# EAGLE board SPWF04SA-v1.0.0 (EAGLE 7.7.0)
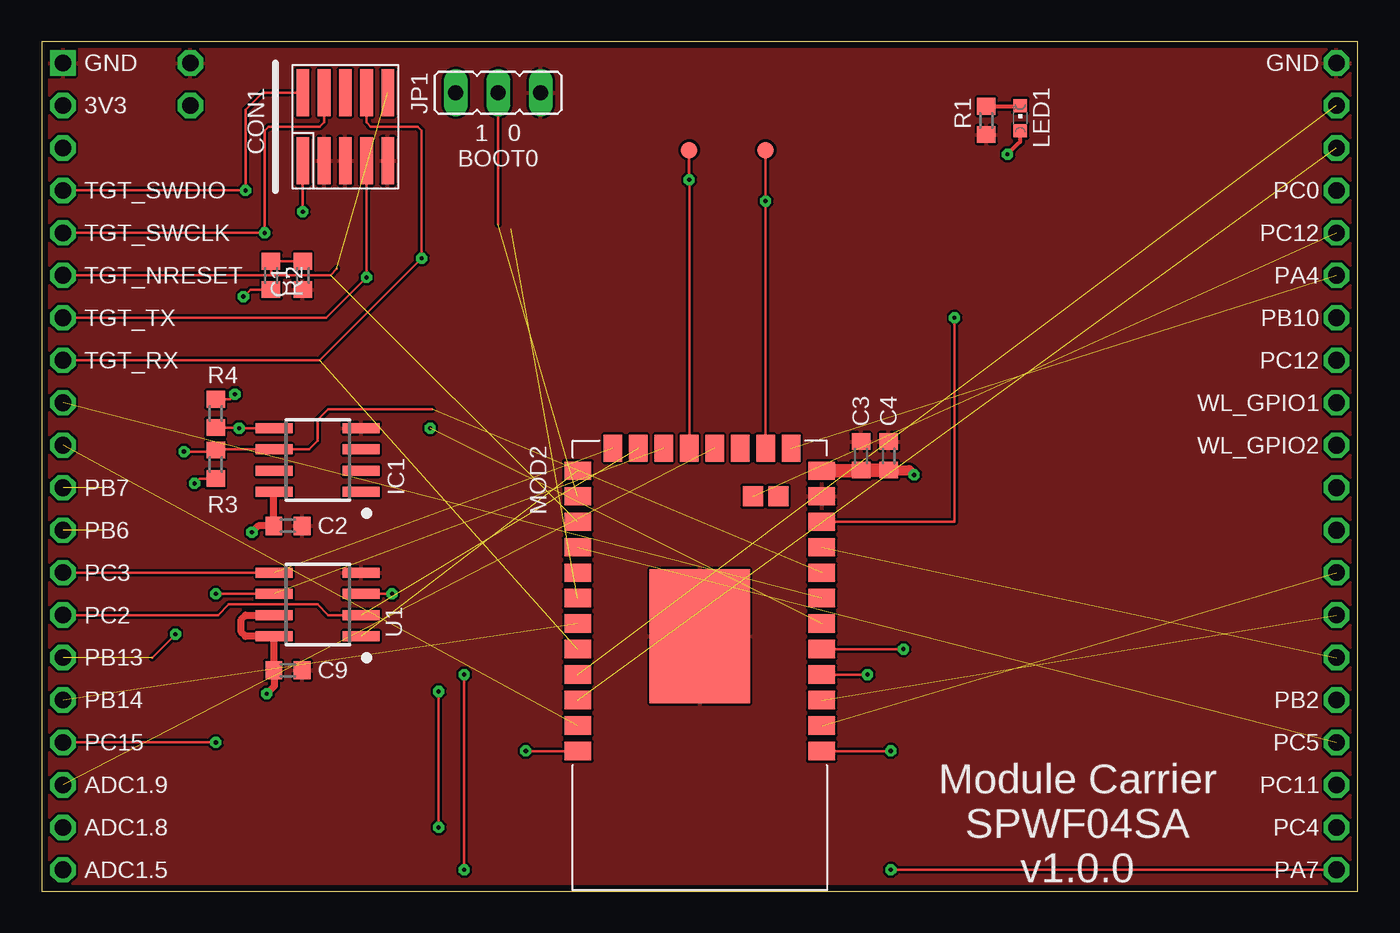
[diagram p0: board, top side]
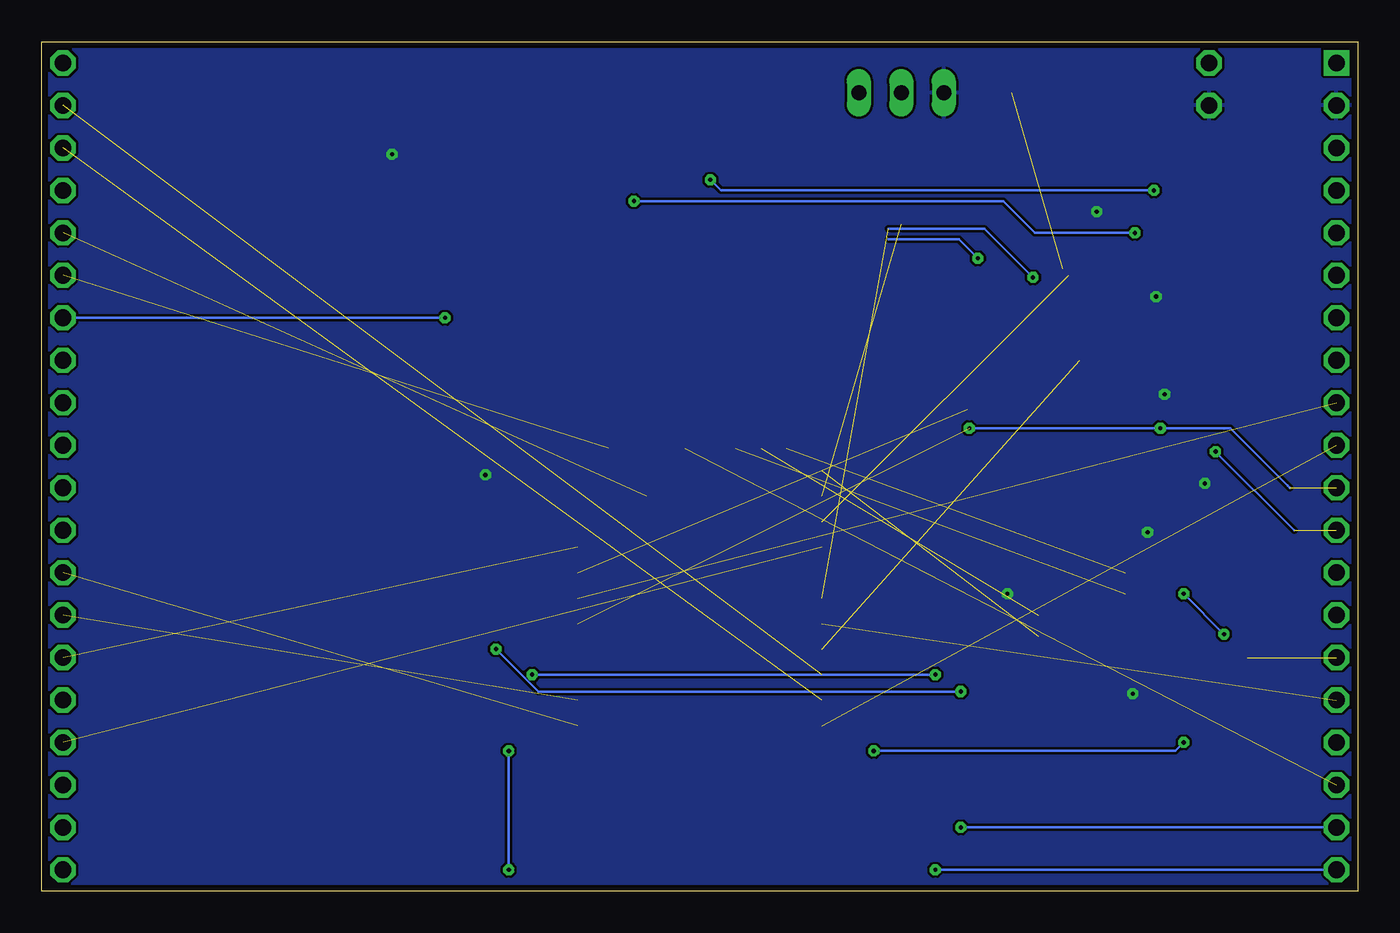
[diagram p1: board, bottom side, seen from below]

Size 78.74 x 50.8 mm. Coordinates in mm from the lower left corner, seen from the top.
Copper layers ((1*16)): Top 0.035mm / dielectric 0.8mm / Bottom 0.035mm
Design rules "mbed-HDK-6-6-2-layer *": minimum track width 6mil, minimum drill 9mil, track to track 6mil, track to pad 6mil, pad to pad 6mil, via to via 6mil, smd to smd 6mil, copper to edge 15mil, drill to drill 8mil, minimum pad ring 10mil, minimum via ring 8mil, stop-mask expansion 4mil, vias tented up to drill 0mil, thermal gap 6mil

## Footprints (pad centres in the part's own frame; a part is rotated, then mirrored left to right if it is on the bottom)
0603 = smd 1 x 1.1: 1 -0.85,0; 2 0.85,0
FTSH-105-02 = smd 0.762 x 2.794: 1 0.381,-2.032; 2 0.381,2.032; 3 1.651,-2.032; 4 1.651,2.032; 5 2.921,-2.032; 6 2.921,2.032; 7 4.191,-2.032; 8 4.191,2.032; 9 5.461,-2.032; 10 5.461,2.032
SO8 = smd 0.6 x 2.2: 1 -1.905,-2.6; 2 -0.635,-2.6; 3 0.635,-2.6; 4 1.905,-2.6; 5 1.905,2.6; 6 0.635,2.6; 7 -0.635,2.6; 8 -1.905,2.6
JP2 = drill 0.914 long: 1 -2.54,0; 2 0,0; 3 2.54,0
CHIPLED_0603 = smd 0.8 x 0.8: A 0,-0.75; C 0,0.75
MODULE_DAUGHTER = drill 1 square: 1 0,0 | drill 1 octagon: 2 0,-2.54; 3 0,-5.08; 4 0,-7.62; 5 0,-10.16; 6 0,-12.7; 7 0,-15.24; 8 0,-17.78; 9 0,-20.32; 10 0,-22.86; 11 0,-25.4; 12 0,-27.94; 13 0,-30.48; 14 0,-33.02; 15 0,-35.56; 16 0,-38.1; 17 0,-40.64; 18 0,-43.18; 19 0,-45.72; 20 0,-48.26; 21 76.2,-48.26; 22 76.2,-45.72; 23 76.2,-43.18; 24 76.2,-40.64; 25 76.2,-38.1; 26 76.2,-35.56; 27 76.2,-33.02; 28 76.2,-30.48; 29 76.2,-27.94; 30 76.2,-25.4; 31 76.2,-22.86; 32 76.2,-20.32; 33 76.2,-17.78; 34 76.2,-15.24; 35 76.2,-12.7; 36 76.2,-10.16; 37 76.2,-7.62; 38 76.2,-5.08; 39 76.2,-2.54; 40 76.2,0
SPWF04SA = smd 1.1 x 1.6: 1 -9.9,-7.3; 2 -8.376,-7.3; 3 -6.852,-7.3; 4 -5.328,-7.3; 5 -3.804,-7.3; 6 -2.28,-7.3; 7 -0.756,-7.3; 8 0.768,-7.3; 9 2.292,-7.3; 10 3.816,-7.3; 11 5.34,-7.3; 12 6.864,-7.3; 13 6.864,7.3; 14 5.34,7.3; 15 3.816,7.3; 16 2.292,7.3; 17 0.768,7.3; 18 -0.756,7.3; 19 -2.28,7.3; 20 -3.804,7.3; 21 -5.328,7.3; 22 -6.852,7.3; 23 -8.376,7.3; 24 -9.9,7.3 | smd 8 x 6: 25 0,0 | smd 1.6 x 1.1: 26 -11.25,-0.628; 27 -11.25,0.896; 28 -11.25,2.42; 29 -11.25,3.944; 30 -11.25,5.468; 31 -11.25,-2.152; 32 -11.25,-3.676; 33 -11.25,-5.2 | smd 1.2 x 1.2: 34 -8.376,4.7; 35 -8.376,3.176
TP50-PTH = drill 1 octagon: TP 0,0
TP10R = smd 1 x 1: TP 0,0

## Placement (x,y rotation side)
C1  100nF  [0603]  15.62,36.83 270 top
C2  100nF  [0603]  14.73,21.84 0 top
C3  100nF  [0603]  49.02,26.04 90 top
C4  10uF  [0603]  50.67,26.04 90 top
C9  100nF  [0603]  14.73,13.21 0 top
CON1  SWD-10/TC2050_SMD  [FTSH-105-02]  15.24,45.72 0 top
IC1  ATECC608A  [SO8]  16.51,25.78 90 top
JP1  BOOT0  [JP2]  27.3,47.75 180 top
LED1  RED  [CHIPLED_0603]  58.55,46.23 0 top
MOD1  MODULE_DAUGHTER  [MODULE_DAUGHTER]  1.27,49.53 0 top
MOD2  SPWF04SA  [SPWF04SA]  39.37,15.24 270 top
R1  1k  [0603]  56.52,46.1 90 top
R2  10k  [0603]  13.72,36.83 270 top
R3  4k7  [0603]  10.41,25.53 270 top
R4  4k7  [0603]  10.41,28.58 90 top
SS1  FLOSSICORN0.5  [FLOSSICORN-0.5]  52.45,33.66 0 top
TP1  TEST-POINT-50R-PTH  [TP50-PTH]  8.89,46.99 0 top
TP2  TEST-POINT-50R-PTH  [TP50-PTH]  8.89,49.53 0 top
TP3  PTR1TP10R  [TP10R]  38.74,44.32 0 top
TP4  PTR1TP10R  [TP10R]  43.31,44.32 0 top
U1  MX25R3235FM1IH0  [SO8]  16.51,17.15 90 top

## Library data of the parts
C1-C4 C9 R1-R4 = mbed-HDK-RLC
CON1 = mbed-HDK-Connector
IC1 JP1 MOD1 MOD2 SS1 TP3 TP4 = blackbriar
LED1 = mbed-HDK-Optical; MF: Wurth Electronics Inc; MFN: 150060RS75000; OC-DIGIKEY: 732-4978-1-ND; OC-MOUSER: 710-150060RS75000; OC-NEWARK: 2322071
TP1 TP2 = mbed-HDK
U1 = blackbriar; MF: Macronix; MFN: MX25R3235FM2IH0; OC-DIGIKEY: 1092-1174-ND

## Nets
+3.3V_TGT: C2.1 C3.1 C4.1 C9.1 CON1.1 IC1.8 JP1.3 LED1.A MOD1.2 MOD2.24 R2.2 R3.2 R4.2 TP1.TP U1.3 U1.7 U1.8
ADC0: MOD1.20 MOD2.16
ADC1: MOD1.19 MOD2.17
ADC2: MOD1.18 MOD2.27
BOOT0: JP1.2 MOD2.2
GND: C1.2 C2.2 C3.2 C4.2 C9.2 CON1.3 CON1.5 CON1.9 IC1.4 JP1.1 MOD1.1 MOD1.40 MOD2.23 MOD2.25 R1.1 TP2.TP U1.4
GPIO6: MOD1.34 MOD2.22
GPIO7: MOD1.21 MOD2.13
GPIO8: MOD1.24 MOD2.4
GPIO9: MOD1.16 MOD2.7
GPIO10: MOD2.5
GPIO12: MOD1.17 MOD2.12
GPIO17: MOD2.28
GPIO18: MOD1.35 MOD2.30
GPIO19: MOD2.34
GPIO20: MOD1.36 MOD2.35
MISO2: MOD1.27 MOD2.15
MOSI2: MOD1.28 MOD2.14
N$1: MOD1.25
N$2: MOD1.23
PA_1: LED1.C R1.2
RXD2: MOD1.10 MOD2.11
SCK2: MOD1.26 MOD2.21
SCL: IC1.6 MOD1.12 MOD2.20 R3.1
SDA: IC1.5 MOD1.11 MOD2.18 R4.1
SPI_!CS: MOD2.1 U1.1
SPI_MISO: MOD1.14 MOD2.32 U1.2
SPI_MOSI: MOD1.13 MOD2.33 U1.5
SPI_SCK: MOD1.15 MOD2.31 U1.6
TGT_CTS: MOD1.39 MOD2.9
TGT_NRESET: C1.1 CON1.10 MOD1.6 MOD2.3 R2.1
TGT_RTS: MOD1.38 MOD2.10
TGT_RX: CON1.8 MOD1.8 MOD2.8
TGT_SWCLK: CON1.4 MOD1.5 MOD2.29 TP4.TP
TGT_SWDIO: CON1.2 MOD1.4 MOD2.26 TP3.TP
TGT_TX: CON1.7 MOD1.7 MOD2.6
TXD2: MOD1.9 MOD2.19

## Tracks (layer width: path | path; a pad name or v marks a point on that pad's centre or on a via)
+3.3V_TGT  (via drill 0.25)
  Top 0.152: CON1.1 v15.62,40.64 | R3.2 9.44,24.68 v9.14,24.38 | R4.2 11.26,29.43 v11.56,29.72 | U1.3 v20.95,17.78 | R2.2 12.48,35.98 v12.06,35.56
  Top 0.254: v57.79,44.07 58.42,44.7 58.55,44.83 LED1.A
  Top 0.406: 13.91,13.24 C9.1 | 13.91,13.24 13.91,12.26 v13.46,11.81 | 13.91,13.24 U1.8 12.19,15.24 11.94,15.49 11.94,16.26 12.19,16.51 U1.7 | v12.57,21.46 12.95,21.84 C2.1 13.88,23.85 IC1.8
  Top 0.61: C4.1 51.9,25.19 v52.2,24.89
  Top 0.813: MOD2.24 49.02,25.14 C3.1 C4.1
  pour Bottom: 0,0 78.74,0 78.74,50.8 0,50.8
ADC0  (via drill 0.25)
  Top 0.152: v25.27,1.27 v25.27,12.95 | v49.4,12.95 MOD2.16
  Bottom 0.152: MOD1.20 v25.27,1.27 | v25.27,12.95 v49.4,12.95
ADC1  (via drill 0.25)
  Top 0.152: MOD2.17 v51.56,14.47 v51.56,14.48 | v23.75,11.94 v23.75,3.81
  Bottom 0.152: v51.56,14.48 49.02,11.94 v23.75,11.94 | v23.75,3.81 MOD1.19
ADC2  (1 unrouted)
BOOT0  (1 unrouted)
  Top 0.152: 27.3,39.88 JP1.2
GND
  pour Top: 0,0 78.74,0 78.74,50.8 0,50.8
GPIO6  (via drill 0.25)
  Top 0.152: MOD2.22 54.6,22.09 54.61,22.1 v54.61,34.29
  Bottom 0.152: v54.61,34.29 MOD1.34
GPIO7  (via drill 0.25)
  Top 0.152: MOD2.13 50.68,8.38 v50.8,8.38 | v50.8,1.27 MOD1.21
  Bottom 0.152: v50.8,8.38 v50.8,1.27
GPIO8  (1 unrouted)
GPIO9  (1 unrouted)
GPIO12  (via drill 0.25)
  Top 0.152: MOD2.12 v28.96,8.38 | v10.41,8.89 MOD1.17
  Bottom 0.152: v28.96,8.38 10.92,8.38 v10.41,8.89
GPIO18  (1 unrouted)
GPIO20  (1 unrouted)
MISO2  (1 unrouted)
MOSI2  (1 unrouted)
PA_1
  Top 0.254: R1.2 58.52,46.95 LED1.C
RXD2  (1 unrouted)
SCK2  (1 unrouted)
SCL  (via drill 0.25)  (2 unrouted)
  Top 0.152: 23.37,28.83 17.14,28.83 16.51,28.19 16.51,26.92 16,26.42 IC1.6 10.45,26.42 R3.1 10.33,26.29 v8.51,26.29
  Bottom 0.152: v8.51,26.29 3.81,21.59
SDA  (via drill 0.25)  (2 unrouted)
  Top 0.152: R4.1 11.77,27.73 v11.81,27.69 IC1.5
  Bottom 0.152: v23.24,27.69 v11.81,27.69 7.62,27.69 4.19,24.26 4.06,24.13
SPI_!CS  (1 unrouted)
SPI_MISO  (1 unrouted)
  Top 0.152: U1.2 17.14,16.51 16.51,17.15 11.18,17.15 10.54,16.51 MOD1.14
SPI_MOSI  (1 unrouted)
  Top 0.152: MOD1.13 U1.5
SPI_SCK  (via drill 0.25)  (2 unrouted)
  Top 0.152: 6.6,13.97 v8,15.37 | v10.41,17.78 U1.6
  Bottom 0.152: v8,15.37 v10.41,17.78
TGT_CTS  (1 unrouted)
TGT_NRESET  (2 unrouted)
  Top 0.152: MOD1.6 11.05,36.83 13.72,36.83 | 13.72,36.83 17.27,36.83 17.65,37.21 | 13.72,36.83 R2.1 C1.1
TGT_RTS  (1 unrouted)
TGT_RX  (via drill 0.25)  (1 unrouted)
  Top 0.152: MOD1.8 16.64,31.75 v22.73,37.85 22.73,45.47 22.48,45.72 19.68,45.72 19.43,45.97 19.43,46.23 CON1.8
  Bottom 0.152: v22.73,37.85 23.88,38.99 28.07,38.99
TGT_SWCLK  (via drill 0.25)
  Top 0.152: MOD1.5 v13.33,39.37 13.33,45.47 13.59,45.72 16.64,45.72 16.89,45.97 CON1.4 | MOD2.29 v43.31,41.27 | v43.31,41.27 | v43.31,41.27 TP4.TP
  Bottom 0.152: v13.33,39.37 19.3,39.37 21.21,41.27 24.38,41.27 27.94,41.27 v43.31,41.27
TGT_SWDIO  (via drill 0.25)
  Top 0.152: MOD1.4 v12.19,41.91 12.19,46.74 13.21,47.75 CON1.2 | MOD2.26 v38.74,42.54 | v38.74,42.54 v38.74,42.55 | v38.74,42.54 v38.74,42.55 | v38.74,42.55 TP3.TP
  Bottom 0.152: v12.19,41.91 24.38,41.91 27.94,41.91 34.67,41.91 36.83,41.91 38.1,41.91 v38.74,42.55
TGT_TX  (via drill 0.25)  (1 unrouted)
  Top 0.152: MOD1.7 17.02,34.29 v19.43,36.7 CON1.7
  Bottom 0.152: v19.43,36.7 22.35,39.62 24.77,39.62 28.07,39.62
TXD2  (1 unrouted)

## Text on the board
tPlace: GND / 3V3 / / TGT_SWDIO / TGT_SWCLK / TGT_NRESET / TGT_TX / TGT_RX / / / PB7 / PB6 / PC3 / PC2 / PB13 / PB14 / PC15 / ADC1.9 / ADC1.8 / ADC1.5 | GND / / / PC0 / PC12 / PA4 / PB10 / PC12 / WL_GPIO1 / WL_GPIO2 / / / / / / PB2 / PC5 / PC11 / PC4 / PA7 | 1 0 / BOOT0 | Module Carrier / SPWF04SA / v1.0.0